# EAGLE board inter (EAGLE 6.4)
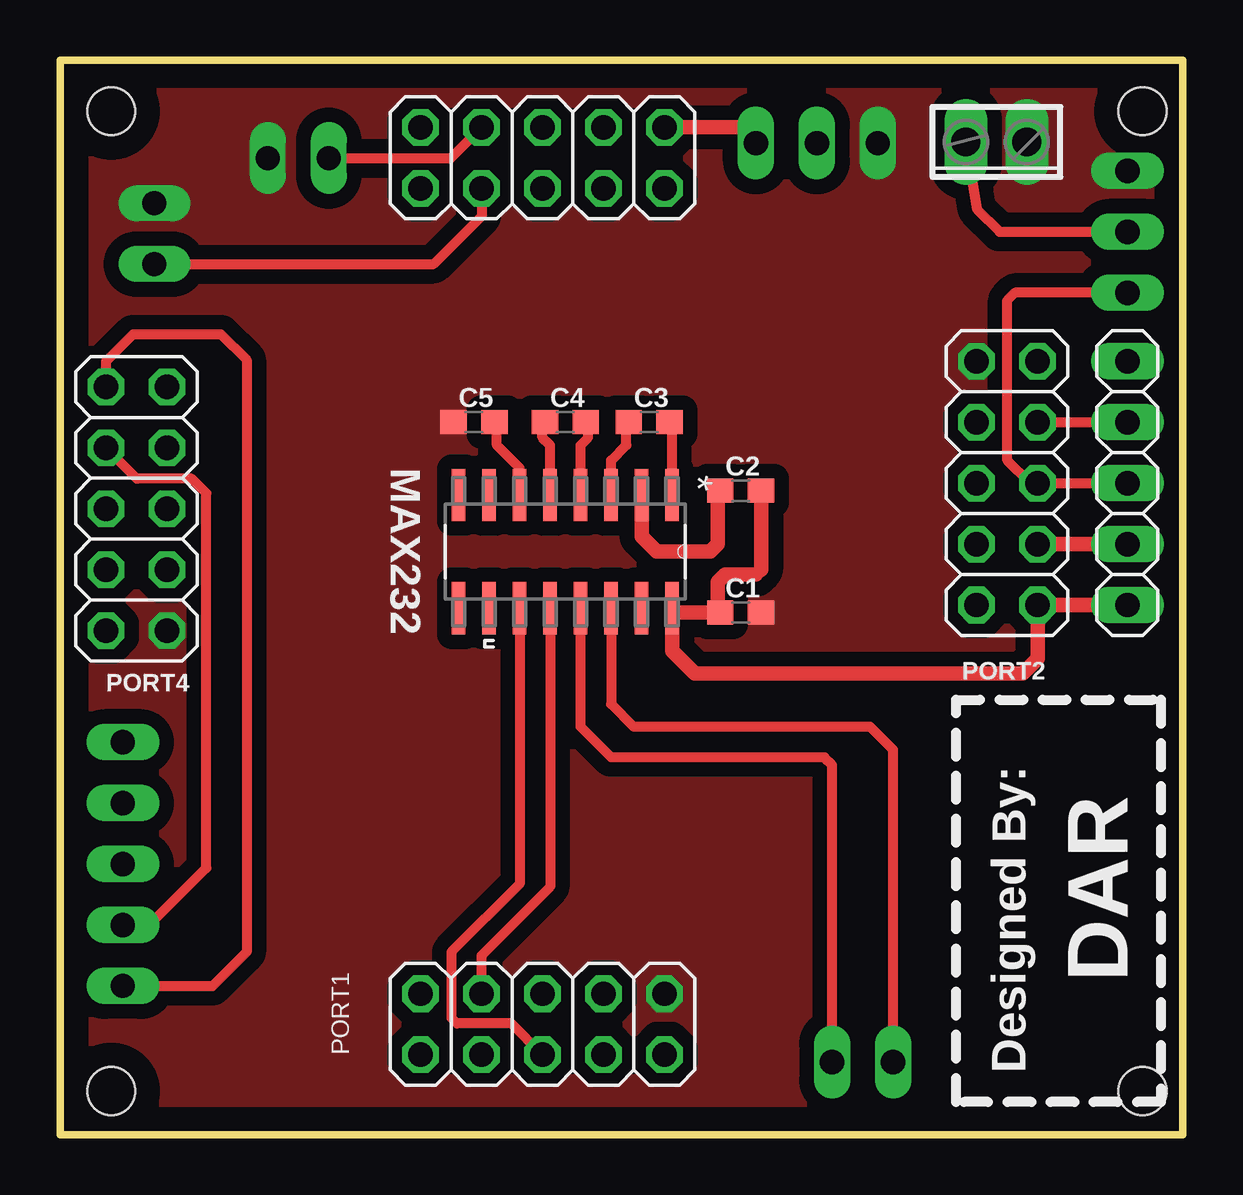
[diagram p0: board, top side]
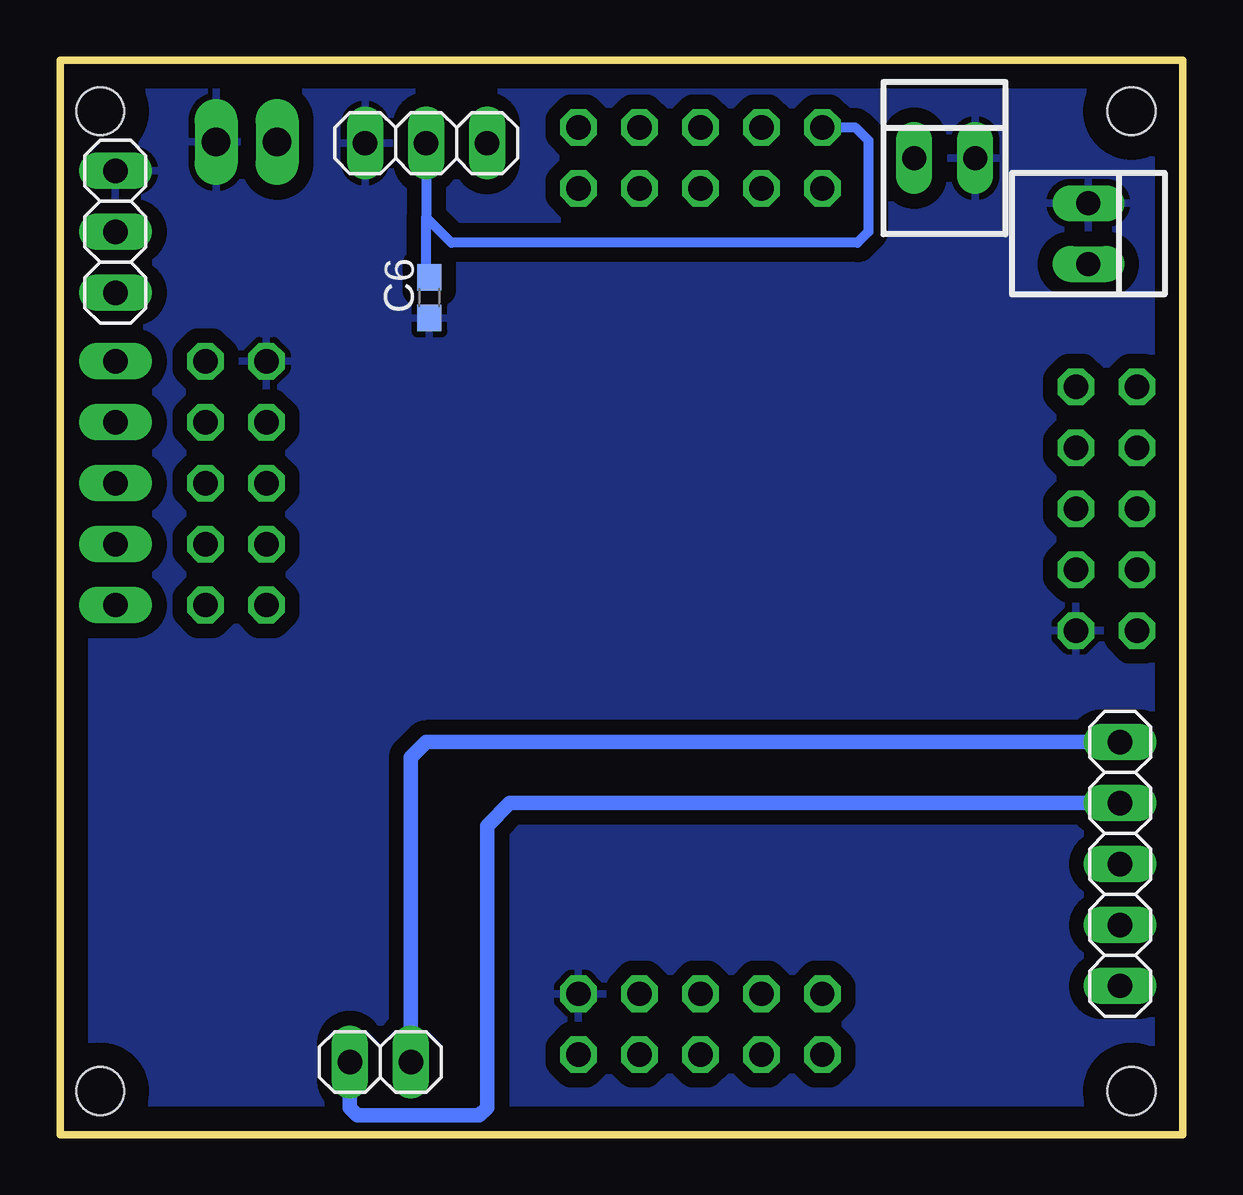
[diagram p1: board, bottom side, seen from below]

Size 46.79 x 44.81 mm. Coordinates in mm from the lower left corner, seen from the top.
Outline: 0,0 46.79,0 46.79,44.81 0,44.81 0,0
Copper layers (1*16): Top 0.035mm / dielectric 1.5mm / Bottom 0.035mm
Design rules "default": minimum track width 10mil, minimum drill 24mil, track to track 8mil, track to pad 8mil, pad to pad 8mil, via to via 8mil, smd to smd 8mil, copper to edge 40mil, drill to drill 8mil, minimum pad ring 10mil, minimum via ring 8mil, stop-mask expansion 4mil, vias tented up to drill 0mil, thermal gap 10mil
Holes 2 mm at 2.13,42.67 45.11,42.67 45.11,1.83 2.13,1.83

## Footprints (pad centres in the part's own frame; a part is rotated, then mirrored left to right if it is on the bottom)
22-23-2021 = drill 1 long: 1 -1.27,0; 2 1.27,0
C0603 = smd 1.1 x 1: 1 -0.85,0; 2 0.85,0
D16 = smd 2.184 x 0.559: 1 -2.362,4.445; 2 -2.362,3.175; 3 -2.362,1.905; 4 -2.362,0.635; 5 -2.362,-0.635; 6 -2.362,-1.905; 7 -2.362,-3.175; 8 -2.362,-4.445; 9 2.362,-4.445; 10 2.362,-3.175; 11 2.362,-1.905; 12 2.362,-0.635; 13 2.362,0.635; 14 2.362,1.905; 15 2.362,3.175; 16 2.362,4.445
2POL254 = drill 1.2 long: 1 -1.27,0; 2 1.27,0
2X05 = drill 1.016 octagon: 1 -5.08,-1.27; 2 -5.08,1.27; 3 -2.54,-1.27; 4 -2.54,1.27; 5 0,-1.27; 6 0,1.27; 7 2.54,-1.27; 8 2.54,1.27; 9 5.08,-1.27; 10 5.08,1.27
1X02 = drill 1.016 long: 1 -1.27,0; 2 1.27,0
1X03 = drill 1.016 long: 1 -2.54,0; 2 0,0; 3 2.54,0
1X05 = drill 1.016 long: 1 -5.08,0; 2 -2.54,0; 3 0,0; 4 2.54,0; 5 5.08,0

## Placement (x,y rotation side)
ADC-0  [22-23-2021]  3.94,37.57 270 bottom
ADC-1  [22-23-2021]  9.93,40.72 0 bottom
C1  C1  [C0603]  28.36,21.77 0 top
C2  C2  [C0603]  28.36,26.85 0 top
C3  C3  [C0603]  24.55,29.71 0 top
C4  C4  [C0603]  21.06,29.71 0 top
C5  C5  [C0603]  17.25,29.71 0 top
C6  C6  [C0603]  31.39,34.9 90 bottom
MAX232  MAX232  [D16]  21.06,24.31 270 top
MOTOR-SUPPLY  [2POL254]  39.01,41.39 180 top
PORT1  PORT1  [2X05]  20.1,4.61 0 top
PORT2  PORT2  [2X05]  39.46,27.17 90 top
PORT3  PORT3  [2X05]  20.1,40.73 180 top
PORT4  PORT4  [2X05]  3.19,26.1 270 top
RX/TX  [1X02]  33.44,3.04 180 bottom
SERVO  [1X03]  44.48,37.64 270 bottom
SUPPLY  [1X05]  44.48,27.17 90 top
VREF  [1X03]  31.53,41.34 0 bottom
ZIGBEE  [1X05]  2.62,11.29 270 bottom

## Library data of the parts
ADC-0 ADC-1 = con-molex
C1-C6 = rcl
MAX232 = max232
MOTOR-SUPPLY = con-phoenix-254
PORT1-PORT4 RX/TX SERVO SUPPLY VREF ZIGBEE = pinhead

## Nets
ADC-0: ADC-0.2 PORT3.8
C4: C4.2 MAX232.4
GND: ADC-0.1 ADC-1.2 C1.2 C5.1 C6.1 MOTOR-SUPPLY.1 PORT1.10 PORT2.10 PORT4.10 SERVO.1 VREF.1
S$1: C3.1 MAX232.3
S$2: C3.2 MAX232.1
S$4: C4.1 MAX232.5
S$6: PORT4.1 ZIGBEE.5
S$7: C1.1 C2.2 MAX232.16
S$8: C2.1 MAX232.2
S$9: C5.2 MAX232.6
S$10: C6.2 PORT3.9 VREF.2
S$11: MAX232.11 PORT1.5
S$12: MAX232.12 PORT1.4
S$13: PORT2.1 SUPPLY.1
S$14: PORT2.3 SUPPLY.2
S$15: PORT2.5 SERVO.3 SUPPLY.3
S$16: PORT2.7 SUPPLY.4
S$17: MOTOR-SUPPLY.2 SERVO.2
S$18: MAX232.13 RX/TX.1 ZIGBEE.1
S$19: MAX232.14 RX/TX.2 ZIGBEE.2
S$21: ADC-1.1 PORT3.7
S$23: PORT3.1 VREF.3
S$24: PORT4.3 ZIGBEE.4

## Tracks (layer width: path | path; a pad name or v marks a point on that pad's centre or on a via)
ADC-0
  Top 0.406: 17.56,39.55 PORT3.8 17.56,38.29 15.57,36.3 ADC-0.2
C4
  Top 0.406: MAX232.4 21.69,28.75 22.01,29.07 22.01,29.6 C4.2
GND
  pour Top (isolate 0.61, no thermals): 46.18,42.69 46.18,1.71 45.08,0.61 2.23,0.61 0.61,2.23 0.61,42.69 2.12,44.2 44.67,44.2
  pour Bottom (isolate 0.61): 45.11,0.61 2.29,0.61 0.61,2.29 0.61,42.67 2.13,44.2 44.65,44.2 46.18,42.67 46.18,1.68
S$1
  Top 0.406: MAX232.3 22.96,28.12 23.6,28.75 23.6,29.7 C3.1
S$2
  Top 0.406: MAX232.1 25.5,29.39 25.18,29.7 C3.2 25.5,29.7
S$4
  Top 0.406: MAX232.5 20.42,28.75 20.1,29.07 20.1,29.6 C4.1
S$6
  Top 0.406: PORT4.1 1.92,32.24 3.05,33.38 6.71,33.38 7.77,32.31 7.77,7.62 6.36,6.21 ZIGBEE.5
S$7
  Top 0.61: C2.2 29.21,23.57 28.99,23.36 27.72,23.36 27.41,23.04 27.41,21.87 C1.1 25.68,21.77 MAX232.16 25.5,20.18 26.45,19.23 40.11,19.23 40.74,19.86 40.74,22.09
S$8
  Top 0.61: MAX232.2 24.23,24.94 24.87,24.31 27.09,24.31 27.41,24.62 27.41,26.85 C2.1 27.72,26.85
S$9
  Top 0.406: MAX232.6 19.15,27.8 18.2,28.75 18.2,29.7 C5.2
S$10
  Bottom 0.406: PORT3.9 13.65,42 13.11,41.45 13.11,37.64 13.56,37.19 30.48,37.19 31.53,38.24 | VREF.2 31.53,38.24 | C6.2 31.53,35.89 31.53,38.24
S$11
  Top 0.406: MAX232.11 19.15,10.46 16.31,7.62 16.31,4.88 16.54,4.65 18.8,4.65 PORT1.5
S$12
  Top 0.406: MAX232.12 20.42,10.34 17.56,7.48 PORT1.4
S$13
  Top 0.61: PORT2.1 SUPPLY.1
S$14
  Top 0.61: PORT2.3 SUPPLY.2
S$15
  Top 0.406: SUPPLY.3 PORT2.5 40.42,27.16 39.47,28.12 39.47,34.78 39.79,35.1 SERVO.3
S$16
  Top 0.406: PORT2.7 SUPPLY.4
S$17
  Top 0.406: MOTOR-SUPPLY.2 38.2,38.59 39.15,37.64 SERVO.2
S$18
  Top 0.406: MAX232.13 21.69,17 22.96,15.73 31.85,15.73 32.17,15.42 RX/TX.1
  Bottom 0.61: RX/TX.1 32.17,15.73 31.53,16.37 ZIGBEE.1
S$19
  Top 0.406: MAX232.14 22.96,17.96 23.91,17 33.76,17 34.71,16.05 RX/TX.2
  Bottom 0.61: ZIGBEE.2 28.04,13.83 28.99,12.88 28.99,1.13 29.31,0.81 34.39,0.81 34.71,1.13 RX/TX.2
S$21
  Top 0.406: ADC-1.1 16.28,40.72 PORT3.7
S$23
  Top 0.61: PORT3.1 28.33,42 VREF.3
S$24
  Top 0.406: ZIGBEE.4 3.72,8.75 6.1,11.12 6.1,26.75 5.49,27.36 3.2,27.36 PORT4.3

## Text on the board
tPlace: DAR | Designed By:
tValues: AREF | PF.1 | PF.5 | 3.3V | 5V | GND | PF.0 | PF.4 | PF.6 | PF.7 | 5V | GND | PE.6 | PE.2 | 3.3V | PC.7 | PB.0 | PC.6 | PB.1 | PB.6 | PB.2 | PB.5 | PB.3 | PB.4 | PB.7 | 3.3V | PD.0 | PD.7 | GND | 5V | PD.1 | PD.2 | PD.5 | PD.6 | 5V | 3.3V | PD.3 | PD.4 | GND